# EAGLE board mech-control-BRD-v0.2 (EAGLE 9.7.0)
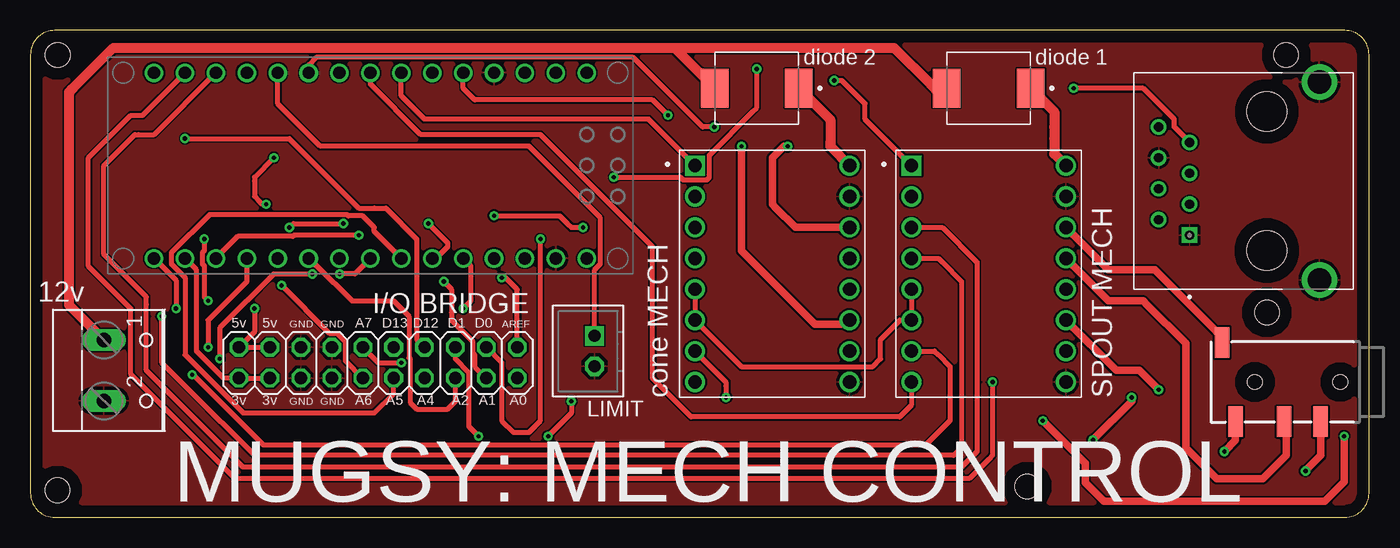
[diagram p0: board, top side]
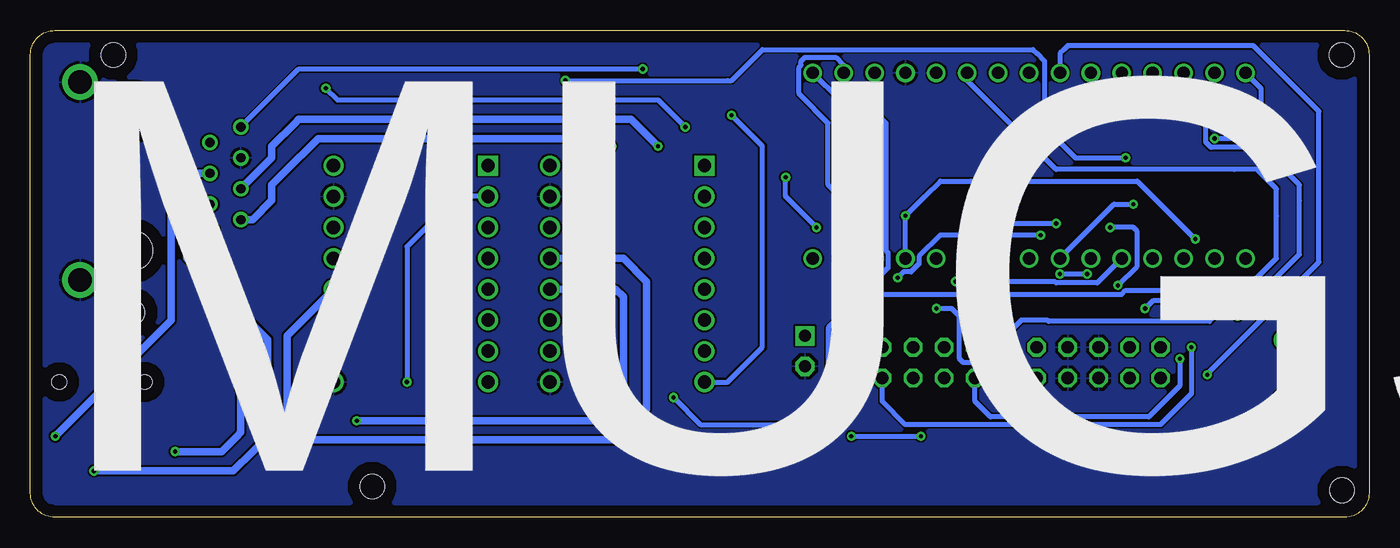
[diagram p1: board, bottom side, seen from below]

Size 110 x 40 mm. Coordinates in mm from the lower left corner, seen from the top.
Outline: 0,2 arc90 2,0 108,0 arc90 110,2 110,38 arc90 108,40 2,40 arc90 0,38 0,2
Copper layers (1*16): Top / Bottom
Stack-up Default Layer Stack: Top User Defined 0.035mm / Dielectric-1 User Defined 1.5mm / Bottom User Defined 0.035mm
Design rules: minimum drill size 0.35mm, minimum copper width 6mil, keepout clearance 0mil, drill distance 6mil, via restrict clearance 0mil, dimension clearance 40mil, restrict clearance 0mil, copper clearance wire_polygon to wire_polygon 6mil, copper clearance wire_polygon to pad_smd 6mil, copper clearance wire_polygon to via 6mil, copper clearance pad_smd to pad_smd 6mil, copper clearance pad_smd to via 6mil, copper clearance via to via 6mil, copper clearance smd to pad (same net) 6mil, copper clearance smd to via (same net) 6mil, copper clearance smd to smd (same net) 6mil
Holes 2 mm at 2.22,2.23 2.24,37.97 103.19,37.98 101.6,16.83 81.92,2.55

## Footprints (pad centres in the part's own frame; a part is rotated, then mirrored left to right if it is on the bottom)
W237-102 = drill 1.194 long: 1 -2.5,-1.27; 2 2.5,-1.27
TE_RJ45-8N-B = drill 0.76 square: 1 -4.445,6.35 | drill 0.76: 2 -3.175,8.89; 3 -1.905,6.35; 4 -0.635,8.89; 5 0.635,6.35; 6 1.905,8.89; 7 3.175,6.35; 8 4.445,8.89 | drill 1.93: 9 -8.125,-4.32; 10 8.125,-4.32 | hole 3.25: -5.715,0; 5.715,0
IC_DRV8825_STEPPER_MOTOR_DRIVER_CARRIER = drill 1.1 square: 1 -6.35,8.89 | drill 1.1: 2 -6.35,6.35; 3 -6.35,3.81; 4 -6.35,1.27; 5 -6.35,-1.27; 6 -6.35,-3.81; 7 -6.35,-6.35; 8 -6.35,-8.89; 9 6.35,-8.89; 10 6.35,-6.35; 11 6.35,-3.81; 12 6.35,-1.27; 13 6.35,1.27; 14 6.35,3.81; 15 6.35,6.35; 16 6.35,8.89
DIOM7959X265N = smd 2.25 x 3.18: A 3.455,0; C -3.455,0
B2B-XH-A = drill 1 pad 1.6 square: 1 1.25,0 | drill 1 pad 1.6 octagon: 2 -1.25,0
2X10 = drill 1.016 octagon: 1 -11.43,-1.27; 2 -11.43,1.27; 3 -8.89,-1.27; 4 -8.89,1.27; 5 -6.35,-1.27; 6 -6.35,1.27; 7 -3.81,-1.27; 8 -3.81,1.27; 9 -1.27,-1.27; 10 -1.27,1.27; 11 1.27,-1.27; 12 1.27,1.27; 13 3.81,-1.27; 14 3.81,1.27; 15 6.35,-1.27; 16 6.35,1.27; 17 8.89,-1.27; 18 8.89,1.27; 19 11.43,-1.27; 20 11.43,1.27
NANO = drill 1.016: 1 -7.62,17.78; 2 -7.62,15.24; 3 -7.62,12.7; 4 -7.62,10.16; 5 -7.62,7.62; 6 -7.62,5.08; 7 -7.62,2.54; 8 -7.62,0; 9 -7.62,-2.54; 10 -7.62,-5.08; 11 -7.62,-7.62; 12 -7.62,-10.16; 13 -7.62,-12.7; 14 -7.62,-15.24; 15 -7.62,-17.78; 16 7.62,-17.78; 17 7.62,-15.24; 18 7.62,-12.7; 19 7.62,-10.16; 20 7.62,-7.62; 21 7.62,-5.08; 22 7.62,-2.54; 23 7.62,0; 24 7.62,2.54; 25 7.62,5.08; 26 7.62,7.62; 27 7.62,10.16; 28 7.62,12.7; 29 7.62,15.24; 30 7.62,17.78
AUDIO_JACK_3.5MM_TRRS_SMD_RA = smd 1.2 x 2.5: EARTH 11.3,-3.25; RING1 6.2,3.25; RING2 3.2,3.25; TIP 10.2,3.25 | hole 1.2: 1.6,0; 8.6,0

## Placement (x,y rotation side)
12V  [W237-102]  7.3,12.07 270 top
CONE-MECH  RJ45-8N-B  [TE_RJ45-8N-B]  101.6,27.63 90 top
CONE_STEPPER  DRV8825_STEPPER_MOTOR_DRIVER_CARRIER  [IC_DRV8825_STEPPER_MOTOR_DRIVER_CARRIER]  60.96,20.01 0 top
D1  SS34  [DIOM7959X265N]  78.74,35.25 180 top
D2  SS34  [DIOM7959X265N]  59.69,35.25 180 top
LIMIT  B2B-XH-2  [B2B-XH-A]  46.35,13.66 90 top
MICRO-OUT  PINHD-2X10  [2X10]  28.57,12.71 0 top
NANO  NANO_FOOTPRINT  [NANO]  27.94,28.9 270 top
SPOUT  AUDIO_JACK_TRRSSMD_RA  [AUDIO_JACK_3.5MM_TRRS_SMD_RA]  109.22,11.12 180 top
SPOUT_STEPPER  DRV8825_STEPPER_MOTOR_DRIVER_CARRIER  [IC_DRV8825_STEPPER_MOTOR_DRIVER_CARRIER]  78.74,20.01 0 top

## Library data of the parts
12V = con-wago-500; MPN: 237-102; OC_FARNELL: unknown; OC_NEWARK: 70K9898
CONE-MECH = mos-rj45; AVAILABILITY: In Stock; CHECK_PRICES: https://www.snapeda.com/parts/RJ45-8N-B/TE+Connectivity+Corcom+Filters/view-part/?ref=eda; DESCRIPTION: Corcom FILTER SIGNAL LINE MODULAR 8CONTACTS 1 PORT THROUGH HOLE | TE Connectivity RJ45-8N-B; MF: TE Connectivity; MP: RJ45-8N-B; PACKAGE: None; PRICE: None; PURCHASE-URL: https://www.snapeda.com/api/url_track_click_mouser/?unipart_id=49386&manufacturer=TE Connectivity&part_name=RJ45-8N-B&search_term=None; SNAPEDA_LINK: https://www.snapeda.com/parts/RJ45-8N-B/TE+Connectivity+Corcom+Filters/view-part/?ref=snap
CONE_STEPPER SPOUT_STEPPER = DRV8825_STEPPER_MOTOR_DRIVER_CARRIER; AVAILABILITY: Unavailable; DESCRIPTION: Stepper, Bipolar 8.2 ~ 45VDC Supply 1.5A 8.2 ~ 45V Load; MF: Pololu; MP: DRV8825 STEPPER MOTOR DRIVER CARRIER; PACKAGE: None; PRICE: None
D1 D2 = SS34; AVAILABILITY: In Stock; CHECK_PRICES: https://www.snapeda.com/parts/SS34/Onsemi/view-part/?ref=eda; DESCRIPTION: Diode Schottky 40 V 3A Surface Mount SMC (DO-214AB); MF: ON Semiconductor; MP: SS34; PACKAGE: SMC-2 ON Semiconductor; PRICE: None; SNAPEDA_LINK: https://www.snapeda.com/parts/SS34/Onsemi/view-part/?ref=snap
LIMIT = con-JST XH
MICRO-OUT = Connector; CATEGORY: Headers; DESCRIPTION: Header, Straight, 2x10 Position; MANUFACTURER: Generic; MPN: Generic; OPERATING_TEMPERATURE: Generic; PART_STATUS: Active; PITCH: 0.100" (2.54mm); ROHS_COMPLIANCE: Generic; SERIES: Generic; SUB-CATEGORY: Headers, Male Pins; TYPE: Board to Board or Cable, Unshrouded, Through Hole, Straight
NANO = SparkFun-Boards
SPOUT = SparkFun-Connectors; PROD_ID: CONN-10676; SF_ID: PRT-12639

## Nets
3V: CONE_STEPPER.5 CONE_STEPPER.6 SPOUT_STEPPER.5 SPOUT_STEPPER.6
+3V3: MICRO-OUT.1 MICRO-OUT.3 NANO.17
+5V: CONE-MECH.8 MICRO-OUT.2 MICRO-OUT.4 NANO.27
+12V: 12V.1 D1.A D2.A
A0: MICRO-OUT.19 NANO.19
A1: MICRO-OUT.17 NANO.20
A2: MICRO-OUT.15 NANO.21
A4/SDA: MICRO-OUT.13 NANO.23
A5/SCL: MICRO-OUT.11 NANO.24
A6: MICRO-OUT.9 NANO.25
A7: MICRO-OUT.10 NANO.26
AREF: MICRO-OUT.20 NANO.18
CONE-VMOT: CONE_STEPPER.16 D2.C
CONE_DIR: CONE_STEPPER.8 NANO.5
CONE_EN: CONE_STEPPER.1 NANO.7
CONE_OUT_1: CONE-MECH.2 CONE_STEPPER.14
CONE_OUT_2: CONE-MECH.3 CONE_STEPPER.13
CONE_OUT_3: CONE-MECH.4 CONE_STEPPER.11
CONE_OUT_4: CONE-MECH.5 CONE_STEPPER.12
CONE_STEP: CONE_STEPPER.7 NANO.6
D0: MICRO-OUT.18 NANO.2
D1: MICRO-OUT.16 NANO.1
D12: MICRO-OUT.14 NANO.15
D13: MICRO-OUT.12 NANO.16
GND: 12V.2 CONE-MECH.1 CONE-MECH.6 CONE-MECH.9 CONE-MECH.10 CONE_STEPPER.9 CONE_STEPPER.15 LIMIT.2 MICRO-OUT.5 MICRO-OUT.6 MICRO-OUT.7 MICRO-OUT.8 NANO.4 NANO.29 SPOUT_STEPPER.9 SPOUT_STEPPER.15
SPOUT-VMOT: D1.C SPOUT_STEPPER.16
SPOUT_DIR: NANO.8 SPOUT_STEPPER.8
SPOUT_EN: NANO.22 SPOUT_STEPPER.1
SPOUT_LIMIT: LIMIT.1 NANO.11
SPOUT_M0: NANO.14 SPOUT_STEPPER.2
SPOUT_M1: NANO.13 SPOUT_STEPPER.3
SPOUT_M2: NANO.12 SPOUT_STEPPER.4
SPOUT_OUT_1: SPOUT.EARTH SPOUT_STEPPER.14
SPOUT_OUT_2: SPOUT.RING1 SPOUT_STEPPER.13
SPOUT_OUT_3: SPOUT.TIP SPOUT_STEPPER.11
SPOUT_OUT_4: SPOUT.RING2 SPOUT_STEPPER.12
SPOUT_STEP: NANO.9 SPOUT_STEPPER.7
STATUS-LED: CONE-MECH.7 NANO.10

## Tracks (layer width: path | path; a pad name or v marks a point on that pad's centre or on a via)
3V
  Top 0.406: SPOUT_STEPPER.5 SPOUT_STEPPER.6 71.44,16.2 69.85,14.61 69.85,13.03 69.22,12.39 58.42,12.39 CONE_STEPPER.6 CONE_STEPPER.5
+3V3
  Top 0.406: NANO.17 13.65,20.33 13.65,13.66 15.88,11.44 MICRO-OUT.1 MICRO-OUT.3
+5V  (via drill 0.35)
  Top 0.406: v14.61,17.79 14.29,18.11 14.29,20.65 14.12,20.82 14.12,21.74 14.29,21.91 v14.29,22.87 | v18.41,17.15 18.41,15.25 MICRO-OUT.2 MICRO-OUT.4 | v38.1,24.77 43.5,24.77 44.13,24.14 44.45,23.82 45.09,23.82 v45.4,23.82 | v47.94,27.95 53.41,27.95 53.64,27.72 55.58,27.72 55.79,27.93 55.79,29.76 59.37,33.34 59.69,33.66 v59.69,36.84
  Bottom 0.406: NANO.27 v38.1,24.77 36.51,26.36 35.24,27.63 32.7,27.63 19.05,27.63 v14.29,22.87 | v14.61,17.79 17.78,17.79 v18.41,17.15 | CONE-MECH.8 87.95,36.84 v59.69,36.84 | v45.4,23.82 47.94,26.36 v47.94,27.95
+12V
  Top 0.406: 73.98,35.57 74.97,35.57 D1.A 74.97,34.93 74.61,34.93
  Top 0.813: 12V.1 3.17,17.43 3.17,22.55 3.17,34.93 3.49,35.25 6.82,38.58 16.19,38.58 51.12,38.58 | 51.12,38.58 52.91,38.58 D2.A | 51.12,38.58 69.53,38.58 70.97,38.58 73.98,35.57 74.61,34.93
A0  (via drill 0.35)
  Top 0.406: NANO.19 17.78,19.38 14.61,16.2 v14.61,13.98
  Bottom 0.406: v14.61,13.98 14.61,10.17 15.88,8.9 17.14,7.63 37.78,7.63 38.1,7.63 40.01,9.53 MICRO-OUT.19
A1  (via drill 0.35)
  Top 0.406: v33.97,19.38 34.61,18.74 34.61,16.83 34.61,16.2 35.88,14.93 36.35,14.46 36.35,13.52 36.51,13.35 36.51,12.39 MICRO-OUT.17
  Bottom 0.406: v33.97,19.38 25.82,19.38 25.7,19.25 22.35,19.25 NANO.20
A2
  Top 0.406: MICRO-OUT.15 34.92,9.53 34.29,8.9 31.75,8.9 31.21,9.43 31.21,13.01 31.11,13.11 31.11,16.52 29.84,17.79 26.41,17.79 23.48,20.72 23.42,20.72 NANO.21
A4/SDA  (via drill 0.35)
  Top 0.406: NANO.23 26.67,20.01 25.72,20.01 25.42,20.01 v25.4,19.99 | v23.18,19.99 19.98,19.99 15.56,15.56 v15.56,13.03
  Bottom 0.406: v25.4,19.99 25.38,20.01 23.18,20.01 v23.18,19.99 | v15.56,13.03 15.56,10.8 18.1,8.26 31.11,8.26 31.75,8.9 32.38,9.53 MICRO-OUT.13
A5/SCL
  Top 0.406: NANO.24 28.26,23.5 28.26,23.82 27.3,24.77 26.12,24.77 26.02,24.87 14.71,24.87 11.58,21.74 11.58,20.82 12.7,19.7 12.7,13.34 17.46,8.58 28.26,8.58 29.84,10.17 MICRO-OUT.11
A6  (via drill 0.35)
  Top 0.406: MICRO-OUT.9 25.88,12.86 25.88,14.44 25.23,15.09 24.6,15.09 v20.64,19.06 | v21.27,23.82 21.59,24.14 v25.72,24.14 | v32.7,24.14 34.29,22.55 34.29,22.23 33.34,21.28 NANO.25
  Bottom 0.406: v20.64,19.06 19.05,20.64 19.05,23.5 19.37,23.82 v21.27,23.82 | v25.72,24.14 v32.7,24.14
A7  (via drill 0.35)
  Top 0.406: MICRO-OUT.10 28.57,12.71 v30.48,12.71 | v35.56,17.15 36.2,17.79 36.2,18.42 36.2,20.64 NANO.26
  Bottom 0.406: v30.48,12.71 33.34,12.71 33.66,13.03 33.66,16.52 34.29,17.15 v35.56,17.15
AREF  (via drill 0.35)
  Top 0.406: MICRO-OUT.20 40.01,18.74 39.05,19.69 v38.73,19.69 | v26.99,23.19 21.68,23.19 21.58,23.09 17.05,23.09 NANO.18
  Bottom 0.406: v38.73,19.69 38.27,20.16 37.64,20.16 36.98,20.82 36.98,21.44 35.24,23.19 34.92,23.19 v26.99,23.19
CONE-VMOT
  Top 0.813: D2.C 65.72,32.67 65.72,30.81 65.72,30.49 CONE_STEPPER.16
CONE_DIR  (via drill 0.35)
  Top 0.406: v52.39,33.03 51.12,34.3 36.51,34.3 35.56,35.25 NANO.5
  Bottom 0.406: CONE_STEPPER.8 52.7,11.12 52.39,11.44 49.85,13.98 49.85,21.92 49.85,30.49 v52.39,33.03
CONE_EN
  Top 0.406: CONE_STEPPER.1 50.8,32.71 50.16,32.71 32.38,32.71 30.8,34.3 30.48,34.61 NANO.7
CONE_OUT_1  (via drill 0.35)
  Top 0.61: CONE_STEPPER.14 62.87,23.82 61.28,25.41 60.96,25.72 60.96,29.53 61.91,30.49 v62.23,30.49
  Bottom 0.61: v62.23,30.49 62.87,31.12 84.45,31.12 86.36,31.12 89.22,28.27 90.17,27.31 90.17,26.04 91.76,24.45 CONE-MECH.2
CONE_OUT_2  (via drill 0.35)
  Top 0.61: v87.31,6.36 90.49,9.53 v90.49,9.85
  Bottom 0.61: CONE_STEPPER.13 61.28,21.28 59.37,19.38 59.37,8.9 61.59,6.67 61.91,6.36 v87.31,6.36 | v90.49,9.85 90.49,14.61 97.16,21.28 97.16,23.82 CONE-MECH.3
CONE_OUT_3  (via drill 0.35)
  Top 0.61: CONE_STEPPER.11 66.99,15.88 64.45,15.88 58.42,21.92 v58.42,30.49
  Bottom 0.61: v58.42,30.49 60.64,32.71 60.96,32.71 87.95,32.71 88.27,32.39 90.17,30.49 90.17,29.85 90.17,29.53 CONE-MECH.4
CONE_OUT_4  (via drill 0.35)
  Top 0.61: v83.19,7.94 86.68,4.45 86.68,4.14 86.68,2.87 88.22,1.32 106.36,1.32 107.95,2.91 107.95,4.45 v107.95,6.67
  Bottom 0.61: CONE_STEPPER.12 61.91,18.74 61.28,18.11 61.28,9.85 61.59,9.53 63.18,7.94 v83.19,7.94 | v107.95,6.67 98.42,16.2 98.42,26.68 96.84,28.27 CONE-MECH.5
CONE_STEP  (via drill 0.35)
  Top 0.406: CONE_STEPPER.7 57.15,11.12 57.15,10.8 v57.15,9.85
  Bottom 0.406: v57.15,9.85 54.93,7.63 44.45,7.63 41.59,10.48 41.59,17.15 40.42,18.32 20.33,18.32 20.02,18.64 10.26,18.64 7.62,21.28 7.62,24.77 7.62,27 9.21,28.58 11.11,28.58 25.72,28.58 32.07,34.93 33.02,35.89 NANO.6
D0  (via drill 0.35)
  Top 0.406: MICRO-OUT.18 38.73,12.71 38.73,7.94 39.69,6.99 40.96,6.99 41.91,7.94 v41.91,22.87
  Bottom 0.406: v41.91,22.87 41.91,24.77 43.18,26.04 44.45,27.31 44.45,32.39 46.67,34.61 46.84,34.78 46.84,36.98 46.67,37.15 46.67,37.47 46.35,37.79 43.81,37.79 43.18,37.16 NANO.2
D1  (via drill 0.35)
  Top 0.406: v44.45,9.53 44.45,8.58 v42.55,6.67 | MICRO-OUT.16 34.92,13.02 36.04,11.9 36.04,7.46 v36.83,6.67
  Bottom 0.406: NANO.1 43.5,34.3 41.59,34.3 39.69,32.39 39.69,23.5 39.69,21.91 39.52,21.74 39.52,20.49 42.55,17.47 44.45,15.56 v44.45,9.53 | v42.55,6.67 v36.83,6.67
D12  (via drill 0.35)
  Top 0.406: v12.7,31.12 21.27,31.12 23.5,28.9 26.99,25.41 28.26,25.41 29.21,25.41 31.75,22.87 31.75,16.83 31.75,14.61 MICRO-OUT.14
  Bottom 0.406: NANO.15 8.89,35.25 8.89,34.93 8.89,33.66 11.43,31.12 v12.7,31.12
D13  (via drill 0.35)
  Top 0.406: NANO.16 11.97,19.47 v11.97,17.15
  Bottom 0.406: MICRO-OUT.12 29.84,14.93 29.53,15.25 28.57,16.2 26.44,16.2 26.34,16.1 13.12,16.1 12.06,17.15 v11.97,17.15
GND
  pour Top: 0.32,28.27 0.32,37.79 arc-90 1.91,39.38 108.27,39.38 arc-90 109.54,38.11 109.54,2.55 arc-90 107.63,0.64 1.59,0.64 arc-90 0.32,1.91 0.32,28.58
  pour Bottom: 1.91,39.38 107.63,39.38 arc-90 109.54,37.47 109.54,2.87 arc-90 107.31,0.64 0.64,0.64 0.64,38.11 arc-90 1.91,39.38 3.81,39.38
SPOUT-VMOT
  Top 0.813: D1.C 84.14,33.31 84.14,32.08 84.14,31.12 84.14,29.85 SPOUT_STEPPER.16
SPOUT_DIR
  Top 0.406: SPOUT_STEPPER.8 72.39,9.22 71.44,8.26 54.29,8.26 51.12,11.44 51.12,22.23 41.91,31.44 32.07,31.44 27.94,35.57 NANO.8
SPOUT_EN  (via drill 0.35)
  Top 0.406: SPOUT_STEPPER.1 68.58,32.71 68.58,33.98 66.67,35.89 v66.04,35.89 | v20,29.53 18.41,27.95 18.41,27.63 18.41,26.36 18.73,26.04 19.05,25.72 v19.37,25.72
  Bottom 0.406: v66.04,35.89 52.7,35.89 52.39,35.89 49.85,38.42 27.62,38.42 27.3,38.11 26.67,37.47 26.67,32.08 24.13,29.53 v20,29.53 | v19.37,25.72 20.95,25.72 NANO.22
SPOUT_LIMIT
  Top 0.406: LIMIT.1 46.35,20.33 46.84,20.82 46.84,24.61 41.91,29.53 40.96,30.49 31.11,30.49 23.81,30.49 20.32,33.98 NANO.11
SPOUT_M0  (via drill 0.35)
  Top 0.406: v79.06,11.12 79.06,5.09 78.74,4.77 77.15,3.18 16.83,3.18 8.26,11.75 8.26,17.15 4.76,20.64 4.76,29.53 5.08,29.85 8.26,33.03 8.89,33.03 9.21,33.03 NANO.14
  Bottom 0.406: SPOUT_STEPPER.2 74.93,26.36 77.79,23.5 79.06,22.23 v79.06,11.12
SPOUT_M1
  Top 0.406: SPOUT_STEPPER.3 74.93,23.82 77.79,20.96 77.79,18.11 77.79,5.41 77.47,5.09 76.52,4.14 18.41,4.14 17.46,4.14 9.84,11.75 9.53,12.07 9.53,17.47 9.53,18.11 6.03,21.6 6.03,28.9 6.35,29.22 8.57,31.44 8.89,31.44 10.16,31.44 NANO.13
SPOUT_M2  (via drill 0.35)
  Top 0.406: SPOUT_STEPPER.4 74.61,21.28 74.93,20.96 76.52,19.38 76.52,18.42 76.52,5.72 75.88,5.09 18.41,5.09 13.02,10.48 10.79,12.71 v10.79,16.52
  Bottom 0.406: v10.79,16.52 5.71,21.6 5.71,26.04 5.71,27.31 8.79,30.39 13,30.39 13.43,30.82 13.43,32.17 NANO.12
SPOUT_OUT_1
  Top 0.152: 97,15.72 97.92,14.8
  Top 0.406: SPOUT.EARTH 97.92,14.8
  Top 0.61: SPOUT_STEPPER.14 88.58,20.33 91.76,20.33 92.39,20.33 97,15.72 97.79,14.93
SPOUT_OUT_2
  Top 0.61: SPOUT_STEPPER.13 88.58,17.79 88.9,17.79 91.44,17.79 91.76,17.47 94.93,14.3 94.93,13.66 94.93,5.72 96.2,4.45 97.47,3.18 101.28,3.18 103.19,5.09 103.19,7.31 103.19,7.7 SPOUT.RING1
SPOUT_OUT_3  (via drill 0.35)
  Top 0.406: SPOUT.TIP 99.06,7.91 99.06,8.26 99.02,8.22 99.02,7.31
  Top 0.61: 99.02,7.31 99.02,6.32 v98.11,5.41 | v92.71,10.48 91.12,12.07 90.49,12.07 89.22,12.07 SPOUT_STEPPER.11
  Bottom 0.61: v98.11,5.41 94.3,5.41 93.03,6.67 92.71,6.99 v92.71,10.48
SPOUT_OUT_4  (via drill 0.35)
  Top 0.61: v104.78,3.82 106.05,5.09 106.05,6.99 106.05,7.84 SPOUT.RING2
  Bottom 0.61: SPOUT_STEPPER.12 88.9,14.93 88.9,14.61 88.9,8.26 91.76,5.41 93.34,3.82 v104.78,3.82
SPOUT_STEP  (via drill 0.35)
  Top 0.406: SPOUT_STEPPER.7 74.3,13.66 74.61,13.34 75.56,12.39 75.56,7.94 73.56,5.94 19.15,5.94 13.38,11.71 v13.29,11.71
  Bottom 0.406: NANO.9 25.4,38.11 25.08,38.42 24.77,38.74 9.53,38.74 4.13,33.34 4.13,20.96 13.29,11.8 v13.29,11.71
STATUS-LED  (via drill 0.35)
  Top 0.406: CONE-MECH.7 93.98,32.08 93.98,32.71 91.44,35.25 v85.72,35.25 | v56.2,32.08 55.24,32.08 51.12,36.2 49.53,37.79 23.5,37.79 22.86,37.16 NANO.10
  Bottom 0.406: v85.72,35.25 84.77,34.3 58.74,34.3 58.42,34.3 v56.2,32.08

## Text on the board
SilkscreenTop: diode 2 | diode 1 | 12v | I/O BRIDGE | cone MECH | SPOUT MECH | LIMIT | MUGSY: MECH CONTROL
SilkscreenBottom: MUGSY
NamesTop: 5v | 5v | GND | GND | A7 | D13 | D12 | D1 | D0 | AREF | 3v | 3v | GND | GND | A6 | A5 | A4 | A2 | A1 | A0